# Altium PCB breeze_pcb.PcbDoc (part 2 of 2)
Units mil, origin at the board's own origin, x right, y up, seen from the top; angles counter-clockwise.
Board outline 3667.19 x 3670.52 mil, 4 copper layers (Top Layer, GND, VCC, Bottom Layer); 124 components, 98 nets, 467 pads, 191 vias.
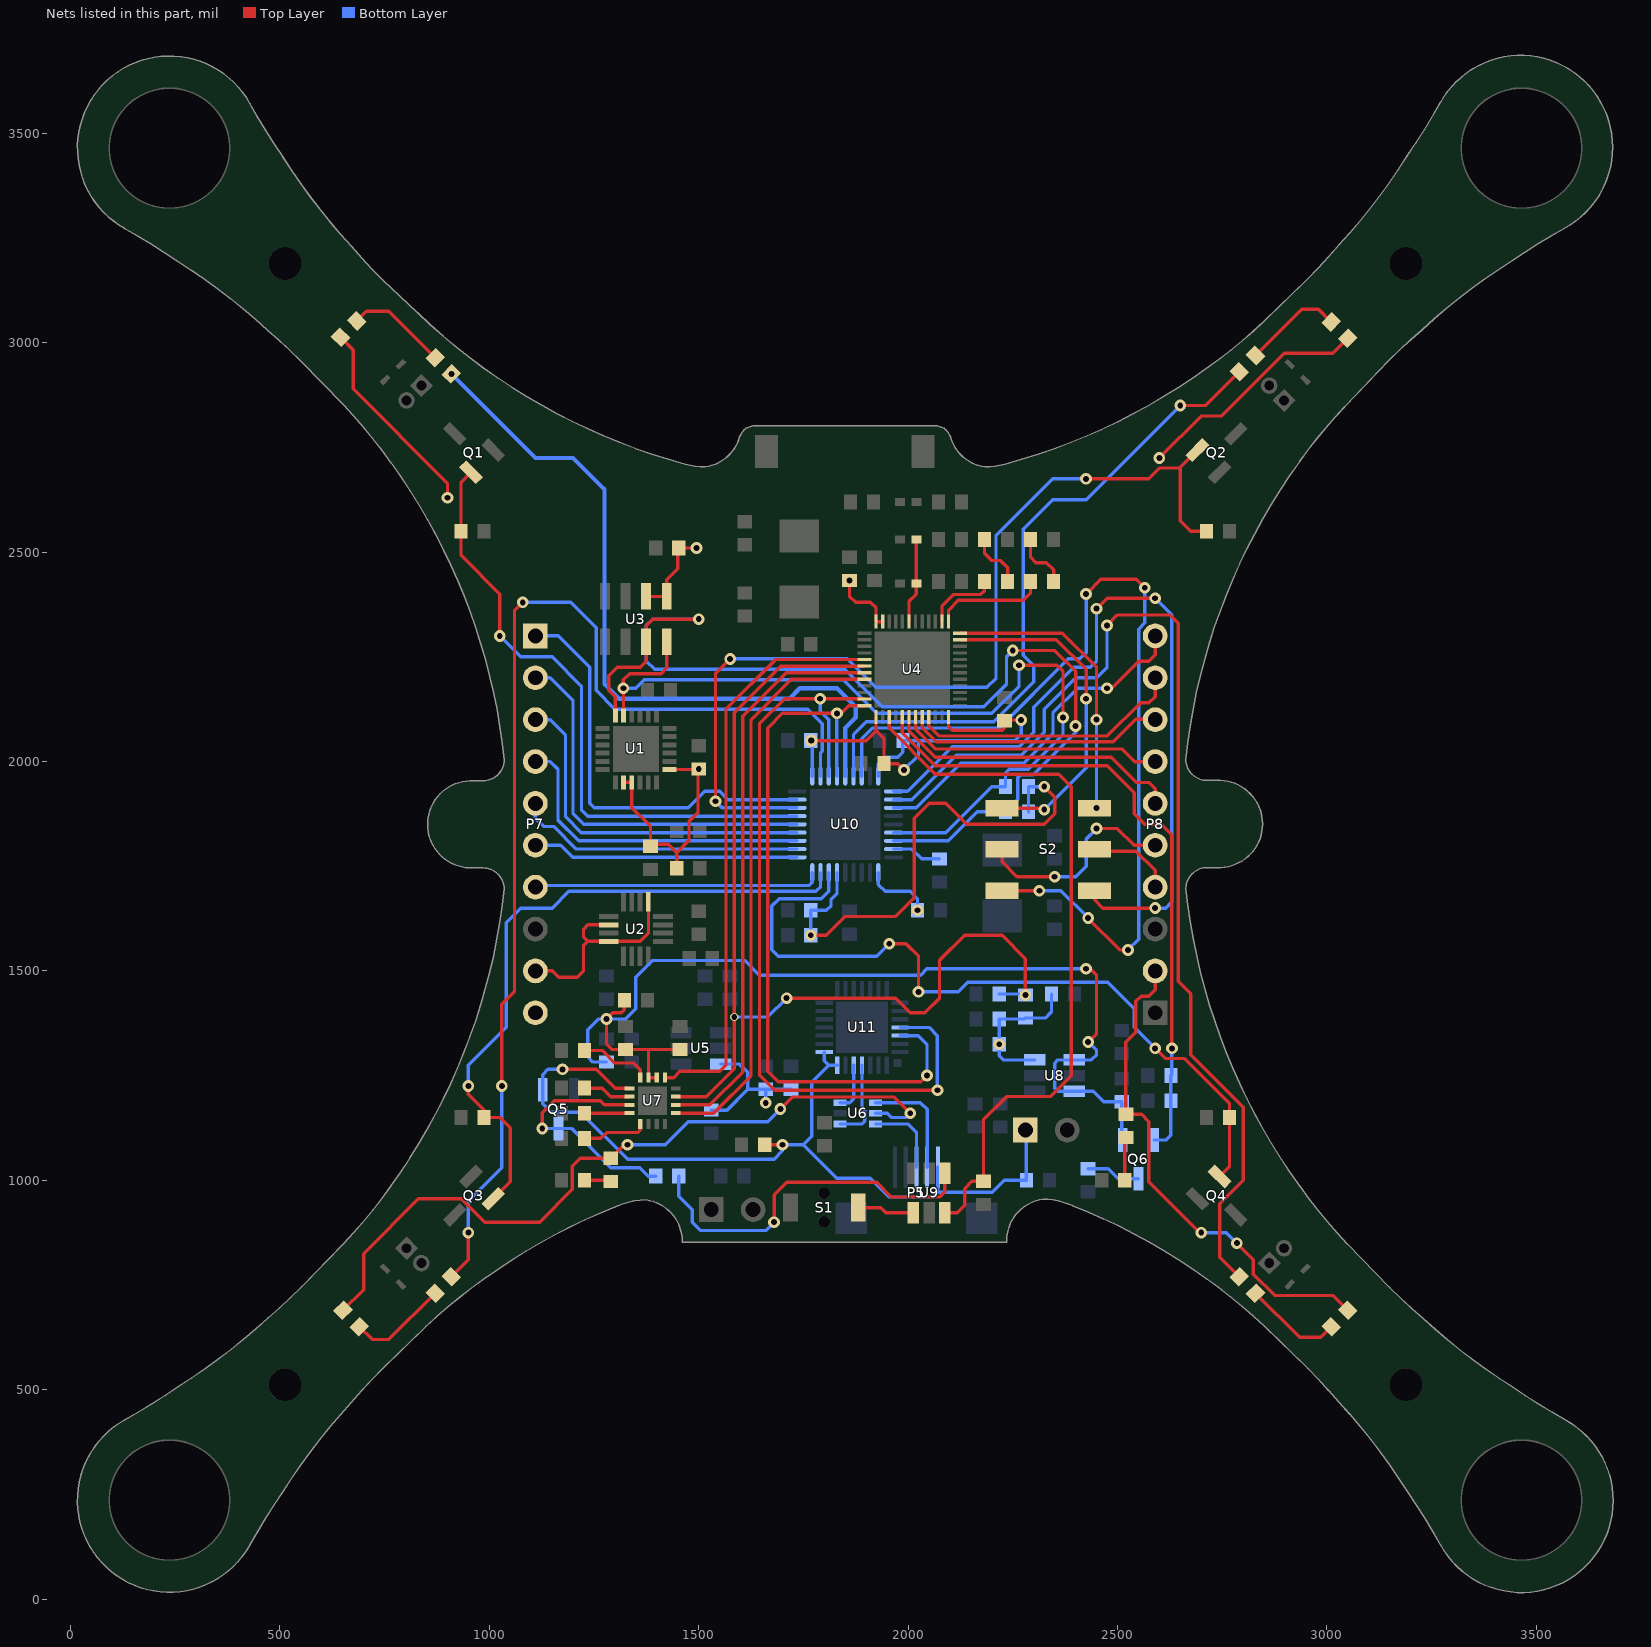
[diagram p4: the nets of this part, all layers, seen from the top]

## Via types
v1: diameter 28, hole 14, Top Layer to Bottom Layer, tented both sides, 133 vias
v2: diameter 24, hole 12, Top Layer to Bottom Layer, tented both sides, 49 vias
v3: diameter 50, hole 40, Top Layer to Bottom Layer, tented both sides, 3 vias
v4: diameter 152.83, hole 113.46, Top Layer to Bottom Layer, 2 vias
v5: diameter 30, hole 20, Top Layer to Bottom Layer, tented both sides, 2 vias
v6: diameter 30, hole 15, Top Layer to Bottom Layer, tented both sides, 1 vias
v7: diameter 20, hole 14, Top Layer to Bottom Layer, tented both sides, 1 vias

## Nets (pads, with @x,y where several pads share a name; then routed paths per layer and width w, separated by ;. In a path a pad name is that pad's centre, name@x,y a point inside that pad or via, vN(x,y) a via of type N, cw(c..) or ccw(c..) an arc to the next point about the centre after c; other vN are vias at no path point) (continued)
NetD5_1: D5.1 R5.2 | length 134.5
  Top Layer w8: D5.1@2182.44,2530 2182.44,2497.56 2200,2480 2220,2480 2237.56,2462.44 R5.2@2237.56,2430
NetD6_1: D6.1 R6.2 | length 137.5
  Top Layer w8: D6.1@2292.44,2530 2292.44,2487.56 2305,2475 2330,2475 2347.56,2457.44 R6.2@2347.56,2430
NetD7_1: D7.1 R13.2 | length 59.9
  Top Layer w8: D7.1@1227.56,1000 R13.2@1287.44,1000
NetD8_1: D8.1 R14.2 | length 100
  Top Layer w8: D8.1@2517.56,1000 R14.2@2517.56,1100
NetD9_2: D9.2 R30.1 | length 242.2
  Top Layer w8: D9.2@683.66,3051.96 706.69,3075 760,3075 R30.1@870.51,2964.49
NetD10_2: D10.2 R31.1 | length 239.4
  Top Layer w8: R31.1@2829.49,2969.49 2940,3080 2980,3080 D10.2@3010.51,3049.49
NetD11_2: D11.2 R33.1 | length 239.4
  Top Layer w8: D11.2@689.49,650.51 720,620 760,620 R33.1@870.51,730.51
NetD12_2: D12.2 R34.1 | length 235.3
  Top Layer w8: R34.1@2829.49,730.51 2935,625 2985,625 D12.2@3010.51,650.51
NetL2_2: L2.2 L3.1 U4.31 | length 203.1
  Top Layer w8: U4.31@2002.13,2334.17 2002.13,2382.13 2019.69,2399.69 L2.2@2019.69,2425 L3.1@2019.68,2530
NetP5_2: P5.2 U6.4 | length 268.5
  Bottom Layer w8: U6.4@1922.32,1185.59 2029.41,1185.59 2045.59,1169.41 P5.2@2045.59,1030.92
NetP5_3: P5.3 U6.6 | length 189.8
  Bottom Layer w8: U6.6@1922.32,1134.41 2000.59,1134.41 2020,1115 P5.3@2020,1030.92
NetP8_4: P8.4 S2.4 | length 205.5
  Top Layer w8: S2.4@2445.24,1790 2449.24,1786 2544,1786 2590,1740 P8.4@2590,1700
NetP8_5: P8.5 S2.1 | length 511.9
  Top Layer w8: S2.1@2224.76,1790 2224.76,1760.24 2260,1725 v1(2350,1725) ; v1(2450,1840) 2500,1840 2540,1800 P8.5@2590,1800
  Bottom Layer w8: v1(2350,1725) 2400,1725 2425,1750 2425,1815 v1(2450,1840)
NetQ5_3: Q5.3 R23.1 U7.15 | length 580.5
  Top Layer w8: v1(1126.26,1123.74) 1126.26,1161.43 1154.83,1190 1265,1190 1274.84,1180.16 U7.15@1334.88,1180.16
  Bottom Layer w8: v1(1126.26,1123.74) Q5.3@1165,1123.74 1196.26,1123.74 1290,1030 1359.5,1030 1379.5,1010 R23.1@1397.44,1010
NetQ6_3: Q6.3 R22.2 | length 129.9
  Bottom Layer w8: R22.2@2430,1027.56 2477.44,1027.56 2501.26,1003.74 Q6.3@2550,1003.74
NetR5_1: R5.1 U4.26 | length 176
  Top Layer w8: U4.26@2080.87,2334.17 2080.87,2370.87 2109,2399 2174,2399 2182.44,2407.44 R5.1@2182.44,2430
NetR6_1: R6.1 U4.25 | length 267.7
  Top Layer w8: U4.25@2096.61,2334.17 2096.61,2361.61 2120,2385 2275,2385 2292.44,2402.44 R6.1@2292.44,2430
NetR18_1: R18.1 U7.12 | length 171.2
  Top Layer w8: R18.1@1227.56,1310 1270,1310 1300,1280 1345,1280 1360.47,1264.53 U7.12@1360.47,1245.12
NetR19_1: R19.1 U7.14 | length 115.7
  Top Layer w8: R19.1@1227.56,1220 1270,1220 1290.16,1199.84 U7.14@1334.88,1199.84
NetR20_1: R20.1 U7.16 | length 107.5
  Top Layer w8: R20.1@1227.56,1160 1334.41,1160 U7.16@1334.88,1160.47
NetR21_1: R21.1 U7.1 | length 155.8
  Top Layer w8: R21.1@1227.56,1100 1266.06,1100 1280.06,1114 1354,1114 1360.47,1120.47 U7.1@1360.47,1134.88
NetR23_2: R23.2 U9.4 | length 884.3
  Top Layer w8: v1(1680,900) 1680,965 1710,995 1925,995 1960,960 2075,960 2087.4,972.4 U9.4@2087.4,1017.24
  Bottom Layer w8: R23.2@1452.56,1010 1452.56,962.44 1485,930 1485,900 1505,880 1660,880 v1(1680,900)
NetR32_1: R32.1 U10.35 | length 119.5
  Bottom Layer w8: U10.35@1965.16,1790.94 2009.06,1790.94 2032.44,1767.56 R32.1@2075,1767.56
NetS1_2: S1.2 U9.1 | length 136.7
  Top Layer w8: S1.2@1880.91,934.8 1935.2,934.8 1947.24,922.76 U9.1@2012.6,922.76
NRF_P0.02: P8.6 U4.6 | length 712.9
  Top Layer w8: U4.6@2002.13,2105.83 2002.13,2072.94 2065.07,2010 2485,2010 2545,1950 2575,1950 2590,1935 P8.6@2590,1900
NRF_P0.03: P8.7 U4.7 | length 633.6
  Top Layer w8: U4.7@2017.87,2105.83 2017.87,2076.99 2064.87,2030 2510,2030 2540.86,1999.14 2589.14,1999.14 P8.7@2590,2000
NRF_P0.04: P8.8 U4.8 | length 617.9
  Top Layer w8: U4.8@2033.62,2105.83 2033.62,2081.04 2067.67,2047 2490.28,2047 2544.14,2100.86 2589.14,2100.86 P8.8@2590,2100
NRF_P0.05: P8.9 U4.9 | length 655.3
  Top Layer w8: U4.9@2049.37,2105.83 2049.37,2085.09 2073.46,2061 2476,2061 2555,2140 2575,2140 2590,2155 P8.9@2590,2200
NRF_SWCLK: S2.5 U4.24 | length 695.6
  Top Layer w8: U4.24@2124.17,2306.61 2368.39,2306.61 2450,2225 v1(2450,2100)
  Bottom Layer w8: v1(2450,1889) v1(2450,2100)
NRF_SWDIO: S2.2 U4.23 | length 815.1
  Top Layer w8: U4.23@2124.17,2290.87 2354.13,2290.87 2425,2220 v1(2425,2150) ; S2.2@2224.76,1888.43 2328.43,1888.43 v1(2325,1885)
  Bottom Layer w8: v1(2325,1885) 2425,1985 v1(2425,2150)
PM_CHG: U4.41 U7.9 | length 1387.7
  Top Layer w8: U7.9@1419.53,1245.12 1440.12,1245.12 1455,1260 1550,1260 1565,1275 1565,2124.85 1683.77,2243.62 U4.41@1895.83,2243.62
PM_EN1: U4.43 U7.6 | length 1376
  Top Layer w8: U7.6@1445.12,1180.16 1526.73,1180.16 1605,1258.43 1605,2108.28 1708.84,2212.13 U4.43@1895.83,2212.13
PM_EN2: U4.44 U7.5 | length 1377.6
  Top Layer w8: U7.5@1445.12,1160.47 1535.33,1160.47 1625,1250.15 1625,2100 1721.38,2196.38 U4.44@1895.83,2196.38
PM_PGOOD: R12.2 R15.2 U4.42 U7.7 | length 2400.3
  Top Layer w8: U7.7@1445.12,1199.84 1518.13,1199.84 ; 1519.14,1200.86 1585,1266.72 v7(1585,1390) 1585,2116.57 1696.31,2227.87 U4.42@1895.83,2227.87 ; v1(1710,1435) 1970,1435 2005,1400 2040,1400 2075,1435 2075,1525 2135,1585 2224.5,1585 2280,1529.5 v1(2280,1442.56)
  Bottom Layer w8: v7(1585,1390) 1665,1390 v1(1710,1435) ; R15.2@2217.56,1445 R12.2@2277.56,1445
PM_SYSOFF: R27.1 U4.3 U9.3 | length 1756.8
  Top Layer w8: U4.3@1954.88,2105.83 1954.88,2080.12 2065,1970 2360,1970 2390,1940 2390,1250 2340,1200 2235,1200 2180,1145 R27.1@2180,997.56 2152.56,997.56 2135,980 2135,940 2117.76,922.76 U9.3@2087.4,922.76
STM_IIC_SCL_VCCA: R28.2 U1.23 U3.8 U10.33 | length 2108.8
  Top Layer w8: U1.23@1320.47,2109.72 1320.47,2174.53 v1(1320,2175) 1320,2195 1335,2210 1410,2210 1423.82,2223.82 U3.8@1423.82,2285.79 ; v1(2265,2230) 2355,2230 2370,2215 v1(2370,2105)
  Bottom Layer w8: v1(1320,2175) 1350,2175 1370,2195 1845,2195 1925,2115 2200,2115 2265,2180 v1(2265,2230) ; U10.33@1965.16,1830.31 2090.31,1830.31 2200,1940 R28.2@2232.44,1940 2232.44,1972.44 2241.72,1981.72 2286.72,1981.72 2370,2065 v1(2370,2105)
STM_IIC_SDA_VCCA: R29.2 U1.24 U3.7 U10.34 | length 2541.2
  Top Layer w8: U1.24@1300.79,2109.72 1300.79,2154.21 1285,2170 1285,2205 1305,2225 1360,2225 1374.61,2239.61 U3.7@1374.61,2285.79 1374.61,2324.61 1390,2340 v1(1500,2340) ; v1(2250,2265) 2350,2265 2400,2215 v1(2400,2085)
  Bottom Layer w8: v1(1500,2340) 1390,2340 1375,2325 1375,2240 1395,2220 1848.97,2220 1937.97,2131 2181,2131 2235,2185 2235,2250 v1(2250,2265) ; U10.34@1965.16,1810.63 2095.63,1810.63 2165,1880 R29.2@2232.44,1880 2261.81,1909.37 2261.81,1961.86 2267.67,1967.72 2297.72,1967.72 2400,2070 v1(2400,2085)
STM_LED1: R30.2 U10.23 | length 1763.5
  Bottom Layer w10: v1(909.49,2925.51) 1110,2725 1200,2725 1275,2650 1275,2184.64 1309.64,2150 1716.38,2150 1741.38,2175 1830,2175 1875,2130 1875,2105 1850,2080 U10.23@1850,1965.16
STM_LED2: R31.2 U10.24 | length 1628.2
  Top Layer w8: v1(2650,2850) 2710,2850 R31.2@2790.51,2930.51
  Bottom Layer w8: U10.24@1869.69,1965.16 1869.69,2064.69 1900,2095 2205,2095 2300,2190 2300,2228.94 2275,2253.94 2275,2555 2345,2625 2425,2625 v1(2650,2850)
STM_LED3: R33.2 U10.20 | length 2730.7
  Top Layer w8: R33.2@909.49,769.49 950,810 v1(950,875) ; v1(1030,1225) 1030,1420 1060,1450 1060,2360 v1(1080,2380)
  Bottom Layer w8: v1(950,875) 950,950 1030,1030 v1(1030,1225) ; v1(1080,2380) 1195,2380 1255,2320 1255,2170 1300,2125 1760,2125 1795,2090 1795,2025 1790.94,2020.94 U10.20@1790.94,1965.16
STM_LED4: R34.2 U10.29 | length 2628.6
  Top Layer w8: v1(2475,2325) 2500,2350 2625,2350 2645,2330 2645,1475 2675,1445 2675,1300 2800,1175 2800,1000 2744.18,944.18 2744.18,815.82 R34.2@2790.51,769.49
  Bottom Layer w8: U10.29@1965.16,1909.06 2009.06,1909.06 2115,2015 2270,2015 2325,2070 2325,2125 2400,2200 2450,2200 2475,2225 v1(2475,2325)
STM_MOTOR1: Q1.1 R1.1 U10.15 | length 1499.9
  Top Layer w8: Q1.1@956.26,2690.84 932.44,2667.02 R1.1@932.44,2550 932.44,2492.56 1025,2400 v1(1025,2300)
  Bottom Layer w8: v1(1025,2300) 1075,2250 1150,2250 1220,2180 1220,1885 1235.31,1869.68 U10.15@1734.84,1869.68
STM_MOTOR2: Q2.1 R2.1 U10.16 | length 2335
  Top Layer w8: v1(1540,1905) 1540,2210 v1(1575,2245) ; v1(2425,2675) 2575,2675 2601,2701 2648.11,2701 2650,2702.89 ; Q2.1@2690.84,2743.74 2650,2702.89 ; R2.1@2712.44,2550 2675,2550 2650,2575 2650,2702.89
  Bottom Layer w8: v1(1540,1905) 1555.63,1889.37 U10.16@1734.84,1889.37 ; v1(1575,2245) 1855,2245 1922.96,2177.04 2084.07,2177.04 2084.11,2177 2188,2177 2210,2199 2210,2540 2345,2675 v1(2425,2675)
STM_MOTOR3: Q4.1 R4.1 U10.7 | length 1847.6
  Top Layer w8: v1(1955,1565) 1995,1565 2025,1535 v1(2025,1450) ; v1(2590,1315) 2614,1291 2659,1291 2767.56,1182.44 R4.1@2767.56,1150 2767.56,1032.98 Q4.1@2743.74,1009.16
  Bottom Layer w8: U10.7@1810.63,1734.84 1810.63,1690.63 1792.72,1672.72 1692.55,1672.72 1674.83,1655 1674.83,1550.17 1690,1535 1925,1535 v1(1955,1565) ; v1(2025,1450) 2119.83,1450 2142.55,1472.72 2477.28,1472.72 2540,1410 2540,1365 v1(2590,1315)
STM_MOTOR4: Q3.1 R3.1 U10.8 | length 1596.7
  Top Layer w8: v1(950,1225) 950,1205 987.56,1167.44 R3.1@987.56,1150 1025,1150 1050,1125 1050,997.11 Q3.1@1009.16,956.26
  Bottom Layer w8: v1(950,1225) 950,1275 1040.56,1365.56 1040.56,1615.56 1075,1650 1150,1650 1190,1690 1780,1690 1790.94,1700.94 U10.8@1790.94,1734.84
STM_PB2: P7.1 U10.17 | length 1009.5
  Bottom Layer w8: P7.1@1110,2300 1165,2300 1240,2225 1240,1900 1250,1890 1475,1890 1514,1929 1549.94,1929 1569.89,1909.06 U10.17@1734.84,1909.06
STM_PB3: P8.10 U10.30 | length 850.6
  Top Layer w8: v1(2475,2175) 2485.94,2175 2550.47,2239.53 2574.53,2239.53 2590,2255 P8.10@2590,2300
  Bottom Layer w8: U10.30@1965.16,1889.37 2019.37,1889.37 2125.72,1995.72 2275.72,1995.72 2346,2066 2346,2116 2405,2175 v1(2475,2175)
STM_SPI_CLK: P7.4 U10.12 | length 774.1
  Bottom Layer w8: P7.4@1110,2000 1145,2000 1164,1981 1164,1860.09 1213.46,1810.63 U10.12@1734.84,1810.63
STM_SPI_MISO: P7.3 U10.13 | length 851
  Bottom Layer w8: P7.3@1110,2100 1145,2100 1182,2063 1182,1867.54 1219.23,1830.31 U10.13@1734.84,1830.31
STM_SPI_MOSI: P7.2 U10.14 | length 928
  Bottom Layer w8: P7.2@1110,2200 1145,2200 1200,2145 1200,1875 1225,1850 U10.14@1734.84,1850
STM_SPI_NSS: P7.5 U10.11 | length 690.5
  Bottom Layer w8: P7.5@1110,1900 1110,1865 1130,1845 1153.63,1845 1207.69,1790.94 U10.11@1734.84,1790.94
STM_SWCLK: S2.6 U10.28 | length 1886.8
  Top Layer w8: S2.6@2445.24,1691.57 2445.24,1669.76 2465,1650 v1(2590,1650) ; v1(2450,2365) 2475,2390 v1(2590,2390)
  Bottom Layer w8: U10.28@1965.16,1928.74 1998.74,1928.74 2105,2035 2265,2035 2300,2070 2300,2130 2395,2225 2435,2225 2450,2240 v1(2450,2365) ; v1(2590,1650) 2615,1650 2630,1665 2630,2350 v1(2590,2390)
STM_SWDIO: S2.3 U10.25 | length 2252.7
  Top Layer w8: S2.3@2224.76,1691.57 v1(2313.43,1691.57) ; v1(2425,2400) 2460,2435 2545,2435 v1(2565,2415) ; v1@2430,1625 2505,1550 v1(2525,1550)
  Bottom Layer w8: U10.25@1889.37,1965.16 1889.37,2054.54 1914.83,2080 2217.06,2080 2382.06,2245 2410,2245 2425,2260 v1(2425,2400) ; v1(2313.43,1691.57) 2365,1691.57 v1(2430,1626.57) ; v1(2525,1550) 2550.47,1575.47 2550.47,2316.37 2565,2330.9 v1(2565,2415)
STM_USART1_RX: U4.48 U10.22 U11.26 | length 1767.3
  Top Layer w8: U4.48@1895.83,2133.39 1858.39,2133.39 1840,2115 v1(1830,2115) 1700,2115 1665,2080 1665,1260 1690,1235 2030,1235 v1(2045,1250)
  Bottom Layer w8: v1(1830,2115) 1830,1965.47 U10.22@1830.31,1965.16 ; U11.26@1980.55,1345.31 2024.69,1345.31 2045,1325 v1(2045,1250)
STM_USART1_TX: U4.47 U10.21 U11.25 | length 1975.7
  Top Layer w8: U4.47@1895.83,2149.13 1894.96,2150 v1(1790,2150) 1705,2150 1645,2090 1645,1251.72 1681.72,1215 v1(2070,1215)
  Bottom Layer w8: v1(1790,2150) 1790,2120 1810.63,2099.37 U10.21@1810.63,1965.16 ; U11.25@1980.55,1365 2050,1365 2070,1345 v1(2070,1215)
STM_USART2_RX: P7.6 U10.10 | length 636.7
  Bottom Layer w8: P7.6@1110,1800 1170,1800 1198.74,1771.26 U10.10@1734.84,1771.26
STM_USART2_TX: P7.7 U10.9 | length 689.5
  Bottom Layer w8: P7.7@1110,1700 1114,1704 1764,1704 1771.26,1711.26 U10.9@1771.26,1734.84
USBD+: U6.1 U11.4 | length 197.5
  Bottom Layer w8: U6.1@1837.68,1134.41 1889.41,1134.41 1896.57,1141.57 1896.57,1167.37 1890,1173.94 U11.4@1890,1274.45
USBD-: U6.3 U11.5 | length 115.8
  Bottom Layer w8: U6.3@1837.68,1185.59 1860.59,1185.59 1870.31,1195.32 U11.5@1870.31,1274.45
VBAT: C32.1 Q6.2 R26.1 U4.5 | length 1570.9
  Top Layer w8: U4.5@1986.38,2105.83 1986.38,2068.62 2065,1990 2475,1990 2540,1925 2540,1875 2565,1850 2605,1850 2630,1825 v1(2630,1315)
  Bottom Layer w8: Q6.2@2587.4,1096.26 2616.26,1096.26 2627.56,1107.56 R26.1@2627.56,1190 C32.1@2627.56,1250 ; C32.1@2630,1252.44 v1(2630,1315)
VCC: C12.1 C13.1 C17.1 C26.1 C27.1 C33.1 C34.1 C35.1 D9.1 D10.1 D11.1 D12.1 P8.2 R11.1 R12.1 R13.1 R14.1 U4.1 U4.12 U4.35 U4.36 U6.5 U8.6 U10.1 U10.19 U10.27 | length 5912.6
  Top Layer w8: D9.1@644.68,3012.99 675,2982.67 675,2890 900,2665 v1(900,2630) ; D11.1@650.51,689.49 700,738.97 700,825 830.82,955.82 933.26,955.82 989.09,900 1120.05,900 1198.19,978.14 1198.19,1033.19 1217.56,1052.56 R13.1@1290,1052.56 1322.44,1085 v1(1330,1085) ; v1(1695,1170) 1724,1199 1966,1199 v1(2005,1160) ; v6(1769,2050) 1900,2050 1923.39,2073.39 ; v1(1860,2432.44) 1860,2395 1875,2380 1910,2380 1923.39,2366.61 U4.36@1923.39,2334.17 U4.35@1939.13,2334.17 ; U4.1@1923.39,2105.83 1923.39,2073.39 ; v1(1990,1980) 1975,1995 C13.1@1942.56,1995 1942.56,2054.21 1923.39,2073.39 ; U4.12@2096.61,2105.83 2096.61,2083.39 2105,2075 2225,2075 2230,2080 C17.1@2230,2097.44 2232.56,2100 2233.56,2099 v1(2270,2099) ; P8.2@2590,1500 2590,1455 2574.53,1439.53 2556.33,1439.53 2544,1427.2 2544,1354 2520,1330 R14.1@2520,1157.56 2557.44,1157.56 2575,1140 2575,996.48 2696.48,875 v1(2700,875) ; v1(2600,2725) 2700,2825 2747.66,2825 2897.66,2975 3013.97,2975 D10.1@3049.49,3010.51 ; v1(2785,850) 2824.48,810.52 2824.48,775.52 2875,725 3013.97,725 D12.1@3049.49,689.49
  Bottom Layer w8: v1(1330,1085) 1420,1085 1475,1140 1665,1140 v1(1695,1170) ; U10.19@1771.26,1965.16 C34.1@1771.26,2046.3 ; U6.5@1922.32,1160 1950,1160 1960,1150 1995,1150 v1(2005,1160) ; U10.1@1928.74,1734.84 1928.74,1706.26 1945,1690 2005,1690 2022.44,1672.56 v1(2022.44,1645) ; U10.27@1928.74,1965.16 1928.74,1993.74 1945,2010 1975,2010 1987.56,2022.56 C35.1@1987.56,2050 2025,2050 ; v1(1990,1980) 2025,2015 2025,2050 ; v1(2270,2099) 2270,2065 2255,2050 2025,2050 ; R12.1@2277.56,1385 R11.1@2217.56,1385 v1(2217.56,1325) 2217.56,1297.44 2227.6,1287.4 U8.6@2302.76,1287.4 ; R12.1@2280,1387.44 2327.44,1387.44 2342.44,1402.44 C27.1@2342.44,1445 ; v1(2700,875) 2760,875 v1(2785,850)
VCCA: C3.1 C5.1 C6.1 C8.1 C20.1 C21.1 C36.1 C37.1 P7.9 R7.1 R28.1 R29.1 U1.8 U1.9 U1.13 U2.2 U2.4 U2.13 U3.1 U3.2 U5.6 U10.6 | length 2902.5
  Top Layer w8: P7.9@1110,1500 1150,1500 ; 1150.5,1500 1165.5,1485 1210,1485 1225,1500 1225,1560.94 1234.53,1570.47 ; U2.2@1285.04,1609.84 1234.84,1609.84 1225,1600 1225,1580 1234.53,1570.47 ; U1.8@1320.47,1950.28 U1.9@1340.16,1950.28 1340.16,1889.84 1385,1845 1385,1802.56 1427.44,1802.56 1447.44,1782.56 ; U3.2@1374.61,2394.21 U3.1@1423.82,2394.21 1423.82,2433.82 1450,2460 C8.1@1450,2507.44 ; U2.13@1380,1664.49 1380,1590 1360.47,1570.47 U2.4@1285.04,1570.47 1234.53,1570.47 ; U1.13@1429.72,1980.79 1498.35,1980.79 1498.35,1878.39 1476.81,1856.86 1476.81,1811.93 1447.44,1782.56 ; C5.1@1447.44,1750 1447.44,1782.56 ; C8.1@1452.56,2510 v1(1495,2510) ; v1(1767.56,1585) 1805,1585 1850,1630 1970,1630 2015,1675 2015,1865 2050,1900 2090,1900 2140,1850 2325,1850 2350,1875 2350,1915 v1(2325,1940)
  Bottom Layer w8: C21.1@1530,1167.56 1567.56,1167.56 1617.44,1217.44 ; U5.6@1552.24,1277.6 1597.4,1277.6 1617.44,1257.56 1617.44,1217.44 ; v1(1660,1185) R7.1@1660,1217.44 ; C20.1@1720,1217.44 R7.1@1660,1217.44 ; v1(1767.56,1585) C37.1@1767.56,1645 1805,1645 1816,1656 1816,1670.96 1830.31,1685.28 U10.6@1830.31,1734.84 ; R29.1@2287.56,1880 R28.1@2287.56,1940 v1(2325,1940) ; 1617.44,1217.44 R7.1@1660,1217.44
  other v1: 1500,1982.44
VCOM: C22.1 C23.1 C28.1 P7.10 Q6.1 R8.1 R25.1 U7.10 U7.11 U8.1 U8.3 | length 2507.7
  Top Layer w8: R25.1@1322.44,1430 1322.44,1407.44 1315,1400 1295,1400 v1(1280,1385) 1280,1325 1292.56,1312.44 C22.1@1325,1312.44 C23.1@1455,1312.44 ; 1380.16,1312.28 U7.11@1380.16,1245.12 U7.10@1399.84,1245.12 ; v1(2425,1505) 2435,1505 2450,1490 2450,1350 v1(2430,1330)
  Bottom Layer w8: R8.1@1280,1282.44 1247.56,1282.44 1235,1295 1235,1360 1260,1385 v1(1280,1385) 1325,1385 1350,1410 1350,1485 1390,1525 1610,1525 1645,1490 2029.8,1490 2044.8,1505 v1(2425,1505) ; v1(2430,1330) 2450,1310 2450,1300 2437.4,1287.4 U8.1@2397.24,1287.4 2357.4,1287.4 2350,1280 2350,1220 2357.4,1212.6 U8.3@2397.24,1212.6 2442.4,1212.6 2467.56,1187.44 C28.1@2510,1187.44 Q6.1@2510,1098.86
VUSB: C30.1 P5.1 P6.1 Q5.1 R24.1 U7.13 U11.7 U11.8 | length 2093.5
  Top Layer w8: v1(1175,1265) 1255,1265 1300.47,1219.53 U7.13@1334.88,1219.53 ; R24.1@1657.56,1085 v1(1700,1085)
  Bottom Layer w8: v1(1175,1265) 1140,1265 1127.6,1252.6 Q5.1@1127.6,1216.26 1127.6,1182.4 1147.72,1162.28 1217.72,1162.28 1330,1050 1680,1050 1700,1070 v1(1700,1085) 1750,1085 ; U11.8@1799.45,1305.94 1799.45,1285.55 1810.55,1274.45 ; U11.7@1830.94,1274.45 1810.55,1274.45 ; P5.1@2071.18,1030.92 2071.18,971.18 ; P6.1@2282.44,1117.56 C30.1@2282.44,1000 2230,1000 2201.18,971.18 2071.18,971.18 ; 1750,1085 1770,1105 1770,1233.9 1810.55,1274.45 ; 1750,1085 1830,1005 1910,1005 1955,960 2060,960 2071.18,971.18
pads on no net: A1.2 P5.0 P5.4 S1.0 U1.2 U1.3 U1.4 U1.5 U1.11 U1.14 U1.15 U1.16 U1.17 U1.19 U1.21 U1.22 U2.3 U2.5 U2.6 U2.7 U2.14 U3.6 U4.2 U4.4 U4.10 U4.11 U4.14 U4.15 U4.16 U4.17 U4.18 U4.19 U4.20 U4.21 U4.22 U4.27 U4.28 U4.40 U4.45 U4.46 U9.5 U11.1 U11.2 U11.9 U11.10 U11.11 U11.12 U11.13 U11.14 U11.15 U11.16 U11.17 U11.18 U11.19 U11.20 U11.21 U11.22 U11.23 U11.24 U11.27 U11.28 U11.30
copper on no net:
  other v4: 956.54,1850.04 2742.36,1850.83

## Polygon pours and split planes (outlines as drawn)
DGND on Top Layer "DGND" (solid, remove dead copper, pour order 46): 1525,2675 1525,2400 1600,2325 1600,2250 2375,2250 2375,2675 2080,2675 2055,2650 2055,2340 2030,2315 1935,2315 1910,2340 1910,2650 1885,2675
AGND on Top Layer "AGND" (solid, remove dead copper, pour order 56): 1475,2675 1475,2350 1525,2300 1525,1475 1210,1475 1210,2375 1150,2435 1150,2675 1475,2675
DGND on Bottom Layer "DGND" (solid, remove dead copper, pour order 50): 1525,2675 1525,2400 1600,2325 1600,2250 2375,2250 2375,2675 1525,2675
AGND on Bottom Layer "AGND" (solid, remove dead copper, pour order 38): 1475,2675 1475,2350 1525,2300 1525,1475 1210,1475 1210,2375 1150,2435 1150,2675
no net on GND (split plane): 2061.27,2751.89 2065.23,2742.33 2069.86,2733.07 2075.14,2724.17 2081.05,2715.67 2087.54,2707.61 2094.59,2700.03 2102.17,2692.98 2110.23,2686.48 2118.73,2680.58 2126.31,2676.08 2080,2676.08 2079.23,2675.77 2054.23,2650.77 2053.92,2650 2053.92,2340.45 2029.55,2316.08 1935.45,2316.08 1911.08,2340.45 1911.08,2650 1910.77,2650.77 1885.77,2675.77 1885,2676.08 1572.58,2676.08 1580.17,2680.58 1588.67,2686.48 1596.73,2692.98 1604.3,2700.03 1611.36,2707.61 1617.85,2715.67 1623.76,2724.17 1629.04,2733.07 1633.67,2742.33 1637.63,2751.89 1639.18,2756.53 2059.72,2756.53
no net on GND (split plane): 1456.38,2666.7 1456.39,2666.7 1456.39,2666.69 1456.04,2666.76 1456.01,2666.77
DGND on GND (split plane): 2532.44,1340 2532.44,1133.13 2456.87,1057.56 1608.13,1057.56 1532.56,1133.13 1532.56,1382.44 2350,1382.44 2351.96,1382.69 2353.03,1383.14 2353.78,1383.45 2355.35,1384.65 2430.35,1459.65 2431.55,1461.22 2432.31,1463.04 2432.34,1463.27 2432.56,1465 2432.56,1800 2432.34,1801.73 2432.31,1801.96 2431.55,1803.78 2430.35,1805.35 2355.35,1880.35 2353.78,1881.55 2353.03,1881.86 2351.96,1882.31 2350,1882.56 2265,1882.56 2263.27,1882.34 2263.04,1882.31 2261.22,1881.55 2259.65,1880.35 2184.65,1805.35 2183.45,1803.78 2183.14,1803.03 2182.69,1801.96 2182.44,1800 2182.44,1638.13 2101.87,1557.56 1808.13,1557.56 1730.35,1635.35 1728.78,1636.55 1728.03,1636.86 1726.96,1637.31 1725,1637.56 1653.13,1637.56 1582.56,1708.13 1582.56,2305 1582.34,2306.73 1582.31,2306.96 1581.55,2308.78 1580.35,2310.35 1507.56,2383.13 1507.56,2658.72 1514.99,2658.5 1515.33,2658.51 1515.45,2658.5 1521.34,2658.89 1521.76,2658.97 1522.41,2659.04 1532.6,2660.88 1542.63,2663.44 1552.45,2666.71 1562.01,2670.67 1569.22,2674.28 1569.23,2674.23 1570,2673.92 1884.55,2673.92 1908.92,2649.55 1908.92,2340 1909.23,2339.23 1934.23,2314.23 1935,2313.92 2030,2313.92 2030.77,2314.23 2055.77,2339.23 2056.08,2340 2056.08,2649.55 2080.45,2673.92 2130,2673.92 2130.22,2674.01 2136.89,2670.67 2146.45,2666.71 2156.27,2663.44 2166.3,2660.88 2176.49,2659.04 2177.14,2658.97 2177.56,2658.89 2183.45,2658.5 2183.57,2658.51 2183.91,2658.5 2196.86,2658.89 2209.77,2660.06 2222.59,2662.01 2235.26,2664.73 2241.76,2666.55 2242.86,2666.76 2242.88,2666.77 2243.49,2666.98 2243.51,2666.98 2242.9,2666.78 2242.88,2666.77 2242.98,2666.41 2243.84,2666.76 2243.76,2667.04 2244.14,2667.13 2244.74,2667.35 2254.28,2669.87 2287.03,2679.31 2319.56,2689.47 2351.85,2700.37 2383.89,2711.98 2415.66,2724.31 2447.15,2737.36 2478.33,2751.1 2509.2,2765.54 2532.44,2777.06
no net on GND (split plane): 2409.21,981.62 2409.26,981.6 2408.8,981.75 2408.68,981.8
AGND on GND (split plane): 1191.47,2765.04 1222.3,2750.61 1253.45,2736.88 1284.9,2723.86 1316.64,2711.54 1348.64,2699.93 1380.89,2689.05 1413.38,2678.9 1446.1,2669.47 1454.87,2667.16 1455.15,2667.06 1455.06,2666.76 1456.28,2666.26 1456.39,2666.69 1456.41,2666.69 1456.78,2666.57 1457.53,2666.44 1463.63,2664.73 1476.31,2662.01 1489.12,2660.06 1492.44,2659.76 1492.44,2380 1492.69,2378.04 1493.14,2376.97 1493.45,2376.22 1494.65,2374.65 1567.44,2301.87 1567.44,1705 1567.69,1703.04 1568.14,1701.97 1568.45,1701.22 1569.65,1699.65 1644.65,1624.65 1646.22,1623.45 1648.04,1622.69 1648.27,1622.66 1650,1622.44 1721.87,1622.44 1799.65,1544.65 1801.22,1543.45 1803.04,1542.69 1805,1542.44 2105,1542.44 2106.96,1542.69 2108.03,1543.14 2108.78,1543.45 2110.35,1544.65 2195.35,1629.65 2196.55,1631.22 2196.86,1631.97 2197.31,1633.04 2197.56,1635 2197.56,1796.87 2268.13,1867.44 2346.87,1867.44 2417.44,1796.87 2417.44,1468.13 2346.87,1397.56 1528.13,1397.56 1455.35,1470.35 1453.78,1471.55 1453.03,1471.86 1451.96,1472.31 1450,1472.56 1263.13,1472.56 1182.56,1553.13 1182.56,2769.45
GND on GND (split plane): 801.67,960.31 803.63,963.25
GND on GND (split plane): 1145 vertices, not listed, extent 61.43,60.45 3638.62,3641.21
VCCA on VCC (split plane): 1817.44,2471.87 1817.44,1132.56 1453.13,1132.56 1382.56,1203.13 1382.56,1375 1382.34,1376.73 1382.31,1376.96 1381.55,1378.78 1380.35,1380.35 1305.35,1455.35 1303.78,1456.55 1303.03,1456.86 1301.96,1457.31 1300,1457.56 1037.12,1457.56 1042.58,1478.27 1050.56,1511.47 1057.78,1544.83 1064.25,1578.36 1069.97,1612.02 1074.93,1645.8 1079.14,1679.68 1080.19,1690.1 1080.33,1690.81 1080.72,1696.7 1080.58,1698.78 1083.43,1698.91 1082.47,1701.22 1080.47,1701.03 1080.39,1702.95 1079.29,1711.3 1077.47,1719.52 1074.93,1727.55 1071.71,1735.34 1067.82,1742.81 1063.3,1749.91 1058.17,1756.59 1052.48,1762.8 1046.27,1768.49 1039.59,1773.62 1032.48,1778.15 1025.01,1782.04 1017.23,1785.26 1009.2,1787.79 1000.97,1789.62 992.62,1790.71 988.66,1790.89 986.94,1791.05 986.92,1791.05 986.41,1791.03 985.9,1791.06 985.88,1791.07 985.87,1791.06 985.85,1791.07 985.67,1791.07 985.66,1791.07 958.53,1791.16 958.67,1792.12 952.51,1794.67 952.5,1791.24 949.93,1791.39 943.4,1792.5 937.04,1794.33 930.93,1796.86 925.13,1800.06 919.74,1803.89 914.8,1808.31 910.39,1813.24 906.56,1818.64 903.36,1824.43 900.83,1830.55 898.99,1836.91 897.89,1843.43 897.51,1850.04 897.89,1856.65 898.99,1863.17 900.83,1869.53 903.36,1875.65 906.56,1881.44 910.39,1886.84 914.8,1891.77 919.74,1896.18 925.13,1900.01 930.93,1903.22 937.04,1905.75 943.4,1907.58 946.96,1908.18 946.92,1907.93 953.14,1905.36 954.67,1905.99 954.57,1908.89 986.14,1908.89 988.04,1909.02 988.14,1906.06 993.42,1908.25 993.25,1909.3 1001.27,1910.36 1009.51,1912.18 1017.55,1914.72 1025.34,1917.94 1032.82,1921.84 1039.93,1926.37 1046.62,1931.5 1052.84,1937.2 1058.54,1943.42 1063.67,1950.11 1068.2,1957.22 1072.09,1964.7 1075.32,1972.49 1077.86,1980.53 1079.68,1988.77 1080.55,1995.34 1081.35,1995.19 1083.82,2001.17 1080.99,2001.29 1081.14,2003.55 1080.83,2008.23 1080.75,2009.44 1080.61,2010.15 1079.57,2020.45 1075.36,2054.34 1070.4,2088.13 1064.68,2121.8 1058.2,2155.33 1050.98,2188.71 1043,2221.92 1034.29,2254.94 1024.83,2287.76 1014.65,2320.35 1003.73,2352.71 992.09,2384.82 979.73,2416.66 966.66,2448.21 952.89,2479.46 938.41,2510.4 923.25,2541 922.5,2542.44 1746.87,2542.44
no net on VCC (split plane): 1456.38,2666.7 1456.39,2666.7 1456.39,2666.69 1456.04,2666.76 1456.01,2666.77
no net on VCC (split plane): 2409.21,981.62 2409.26,981.6 2408.8,981.75 2408.68,981.8
VCOM on VCC (split plane): 322 vertices, not listed, extent 61.43,61.23 2492.44,1442.44
VCC on VCC (split plane): 801 vertices, not listed, extent 61.43,60.45 3638.62,3641.21

## Keep-outs
Keep-Out Layer:
  lines w1.97: 1296.65,937.8 ccw(c1297.64,937.8) 1298.62,937.8 ccw(c1297.64,937.8) 1296.65,937.8
  lines w3.94: 130.26,3274.53 cw(c-591.89,1969.33) 256.79,3196.03 cw(c-513.15,1969.33) 471.36,3031.57 cw(c-434.41,1969.33) 551.72,2957.42 ; 130.76,3274.51 cw(c236.06,3465) 426.92,3569.63 ccw(c1732.13,4291.77) 505.42,3443.09 ccw(c1732.13,4213.03) 669.89,3228.53 ccw(c1732.13,4134.29) 744.04,3148.17 827.52,3069.94 ccw(c1849.68,4131.84) 1467.16,2708.42 ccw(c1514.99,2873.1) 1515.59,2701.61 ccw(c1501.78,2802.56) 1600.38,2776.91 ; 426.53,130.06 cw(c1731.73,-592.09) 505.03,256.59 cw(c1731.73,-513.35) 669.49,471.16 cw(c1731.73,-434.61) 743.64,551.52 847.42,652.39 cw(c1692.36,-237.76) 985.27,765.39 cw(c1850.24,-433.03) 1301.39,939.25 ; 426.55,130.56 cw(c236.06,235.87) 131.44,426.72 ccw(c-590.71,1731.93) 257.97,505.23 ccw(c-511.97,1731.93) 472.54,669.69 ccw(c-433.23,1731.93) 552.9,743.84 653.77,847.62 ccw(c-236.38,1692.56) 766.77,985.47 ; 551.71,2957.42 652.59,2853.64 cw(c-237.56,2008.7) 765.59,2715.79 ; 765.93,2716.05 cw(c-432.83,1850.04) 1038.2,2001.93 ; 766.55,985.62 ccw(c-432.83,1850.04) 1037.64,1696.89 ; 953.14,1952.01 986.46,1952.01 ; 953.14,1952.03 ccw(c956.54,1850.04) 952.35,1748.08 985.72,1747.95 cw(c984.21,1694.53) 1037.6,1696.89 ; 986.46,1952.03 ccw(c984.49,2005.55) 1037.99,2003.19 ; 1297.64,937.8 1305.91,940.94 ; 1304.58,940.38 cw(c1374,783.57) 1374.6,955.06 cw(c1360.79,854.11) 1462.67,854.01 2233.47,854.01 ; 1600.66,2776.78 cw(c1646.3,2755.94) 1613.18,2793.62 ; 1613.26,2793.48 cw(c1635.67,2755.94) 1636.85,2799.65 1849.84,2799.65 ; 1849.06,2799.65 2062.05,2799.65 cw(c2063.23,2755.94) 2085.64,2793.48 ; 2085.72,2793.62 cw(c2052.6,2755.94) 2098.23,2776.78 ; 2098.52,2776.91 ccw(c2197.12,2802.56) 2183.31,2701.61 ccw(c2183.91,2873.1) 2231.74,2708.42 ccw(c1850.24,4133.9) 2713.55,2937.14 ; 2233.47,855.58 cw(c2335.35,855.69) 2321.54,956.63 ; 2322.33,956.63 cw(c2322.93,785.14) 2392.76,941.77 ; 2393.52,941.31 cw(c1850.24,-433.03) 2714.41,765.79 cw(c2007.32,-237.36) 2852.25,652.79 2956.05,551.91 cw(c1967.95,-434.21) 3030.19,471.55 cw(c1967.95,-512.95) 3194.65,257 cw(c1967.95,-591.69) 3273.16,130.45 ccw(c3464.02,235.08) 3569.32,425.56 ; 2660.69,2002.71 cw(c4131.73,1850.83) 2932.96,2716.84 ; 2660.91,2003.98 ccw(c2714.41,2006.34) 2712.44,1952.82 ; 2661.26,1697.67 ccw(c4131.73,1850.83) 2934.09,984 ; 2661.3,1697.68 cw(c2714.69,1695.32) 2713.17,1748.74 2746.55,1748.86 ; 2712.44,1952.8 2745.76,1952.8 cw(c2742.36,1850.83) 2746.55,1748.87 ; 2713.63,2937.05 ccw(c2006.54,3940.2) 2851.47,3050.04 2955.26,3150.92 ccw(c1967.16,4137.05) 3029.41,3231.28 ccw(c1967.17,4215.79) 3193.86,3445.84 ; 2926.09,2707.99 cw(c3947.95,1987.71) 3041.19,2848.39 ; 2934.49,984.29 ccw(c3937.64,1691.38) 3047.48,846.45 3148.37,742.66 ; 3041.75,2848.9 3146,2958.6 cw(c4132.13,1970.51) 3226.36,3032.75 cw(c4210.87,1970.51) 3440.91,3197.21 ; 3148.36,742.66 ccw(c4134.49,1730.75) 3228.72,668.51 ccw(c4213.23,1730.75) 3443.28,504.05 ccw(c4291.97,1730.75) 3569.82,425.54 ; 3193.87,3445.85 ccw(c1967.17,4294.53) 3272.37,3572.38 ; 3272.35,3571.88 cw(c3462.83,3466.57) 3567.46,3275.72 ccw(c4289.61,1970.51) 3440.93,3197.21

## Other copper
GND (plane layer: these items are gaps in the copper):
  lines w2: 1570,2675 1885,2675 1910,2650 1910,2340 1935,2315 2030,2315 2055,2340 2055,2650 2080,2675 2130,2675
  lines w15: 1175,2775 1175,1550 1260,1465 1450,1465 1525,1390 ; 1500,2665 1500,2380 1575,2305 1575,1705 1650,1630 1725,1630 1805,1550 2105,1550 2190,1635 2190,1800 2265,1875 2350,1875 2425,1800 2425,1465 2350,1390 1525,1390 ; 2540,2790 2540,1340 2540,1130 2460,1050 1605,1050 1525,1130 1525,1390
VCC (plane layer: these items are gaps in the copper):
  region: 1570,2675 1885,2675 1910,2650 1910,2340 1935,2315 2030,2315 2055,2340 2055,2650 2080,2675 2129,2675 2062.02,2760 1980,2760 1930,2760 1825,2760 1690,2760 1641.25,2760
  lines w2: 1570,2675 1885,2675 1910,2650 1910,2340 1935,2315 2030,2315 2055,2340 2055,2650 2080,2675 2130,2675
  lines w15: 915,2550 1750,2550 1825,2475 1825,1125 ; 1030,1450 1300,1450 1375,1375 1375,1200 1450,1125 2425,1125 2500,1050 2500,935

## Silkscreen, mask and mechanical layers (free items; w line width, h text height)
Top Overlay:
  lines w10: 1510,1020 1550,1020 ; 1530,1000 1530,1040 ; 1610,1020 1650,1020
  text "M2" at 3210,3270 h60 r315
  text "M1" at 430,3200 h60 r45
  text "SWDIO SWCLK" at 2195,1950 h30
  text "NRF" at 2100,1870 h30
  text "STM" at 2090,1680 h30
  text "M4" at 3280,500 h60 r225
  text "M3" at 500,420 h60 r135
Top Paste:
  lines w10: -118.11,-118.11 3818.9,-118.11 ; -118.11,-118.11 -118.11,3818.9 ; -118.11,-118.11 3818.9,3818.9 ; -118.11,3818.9 3818.9,-118.11 ; -118.11,3818.9 3818.9,3818.9 ; 1850.39,-118.11 -118.11,1850.39 1850.39,3818.9 3818.9,1850.39 1850.39,-118.11 ; 1850.39,-118.11 1850.39,-118.11 ; 3818.9,-118.11 3818.9,3818.9 ; 236.22,236.22 3464.57,236.22 3464.57,3464.57 236.22,3464.57 236.22,236.22
Mechanical 16:
  drawing of 3178 lines, arcs and shapes, not listed
  text "1" at -1271.11,5216.89 h70
  text "2" at 1588.89,5216.89 h70
  text "3" at 4468.89,5216.89 h70
  text "4" at 7338.89,5216.89 h70
  text "A" at -2623.11,4310.89 h70
  text "A" at 8676.89,4310.89 h70
  text "B" at -2623.11,2418.89 h70
  text "C" at -2623.11,508.89 h70
  text "Author:" at 4151.89,-948.11 h100
  text "Title:" at 5651.89,-948.11 h100
  text "myyerrol" at 4286.89,-1073.11 h120
  text "Time:" at 4151.89,-1243.11 h100
  text "Breeze Quadcopter" at 5746.89,-1283.11 h300
  text "D" at -2623.11,-1381.11 h70
  text "D" at 8676.89,-1381.11 h70
  text ".Print_Time" at 4286.89,-1383.11 h120
  text "Date:" at 4151.89,-1548.11 h100
  text "File Content:" at 5646.89,-1548.11 h100
  text "Team MicroDynamics" at 2851.89,-1648.11 h120
  text "Cheap, easy-to-use and intelligent quadcopter." at 5756.89,-1668.11 h120
  text ".Print_Date" at 4281.89,-1688.11 h120
  text "NWPU" at 2851.89,-1748.11 h120
  text "File Name:" at 5646.89,-1828.11 h100
  text "Revison:" at 4156.89,-1843.11 h100
  text "Xi'an, Shannxi" at 2851.89,-1848.11 h120
  text ".Pcb_File_Name_No_Path" at 5761.89,-1943.11 h120
  text "China" at 2851.89,-1948.11 h120
  text "V0.1" at 4281.89,-1978.11 h120
  text "1" at -1271.11,-2183.11 h70
  text "2" at 1588.89,-2183.11 h70
  text "3" at 4468.89,-2183.11 h70
  text "4" at 7338.89,-2183.11 h70

## Text inside footprints (layer, text, board x,y; h text height)
LOGO1: Top Overlay "y" at 1719.21,1897.48 h30 r270; Top Overlay "GYR" at 1855.83,1897.48 h30 r270; Top Overlay "ACC" at 1805.83,1898.66 h30 r270; Top Overlay "x" at 1857.4,1756.14 h30 r270; Top Overlay "z" at 1744.41,1758.11 h30 r270
LOGO2: Top Overlay "x" at 1715,1405 h30 r270; Top Overlay "z" at 1742.28,1544.33 h30 r270; Top Overlay "Mag" at 1854.76,1466.26 h30 r270; Top Overlay "y" at 1858.7,1542.36 h30 r270
LOGO3: Top Overlay "Team MicroDynamics" at 1945,1355 h35